# Altium PCB BGA Breakout.PcbDoc
Units mil, origin at the board's own origin, x right, y up, seen from the top; angles counter-clockwise.
Board outline 720.74 x 1220 mil, 2 copper layers (Top Layer, Bottom Layer); 3 components, 9 nets, 136 pads, 0 vias.
Unrouted connection lines stored in the file: 1.
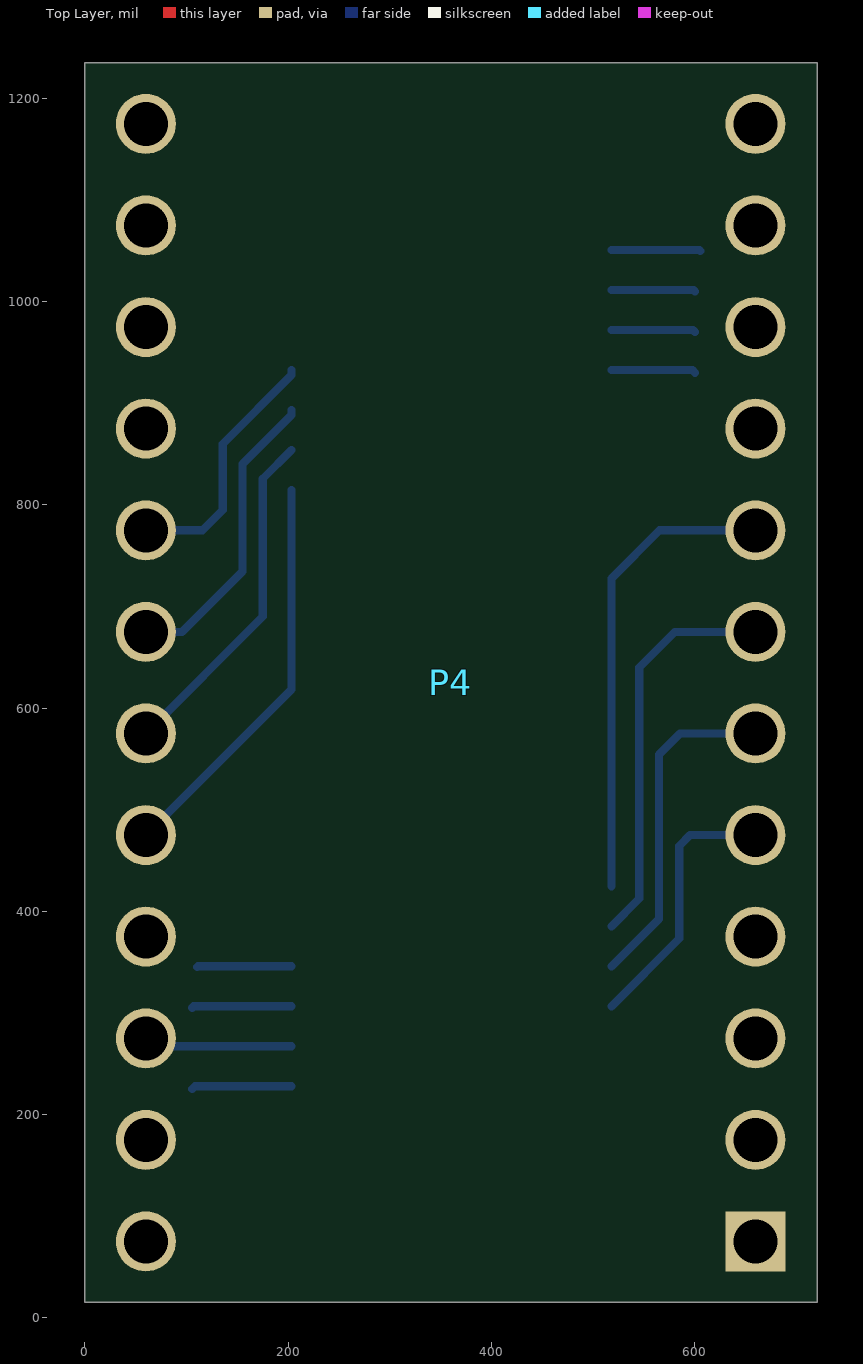
[diagram p0: Top Layer view]
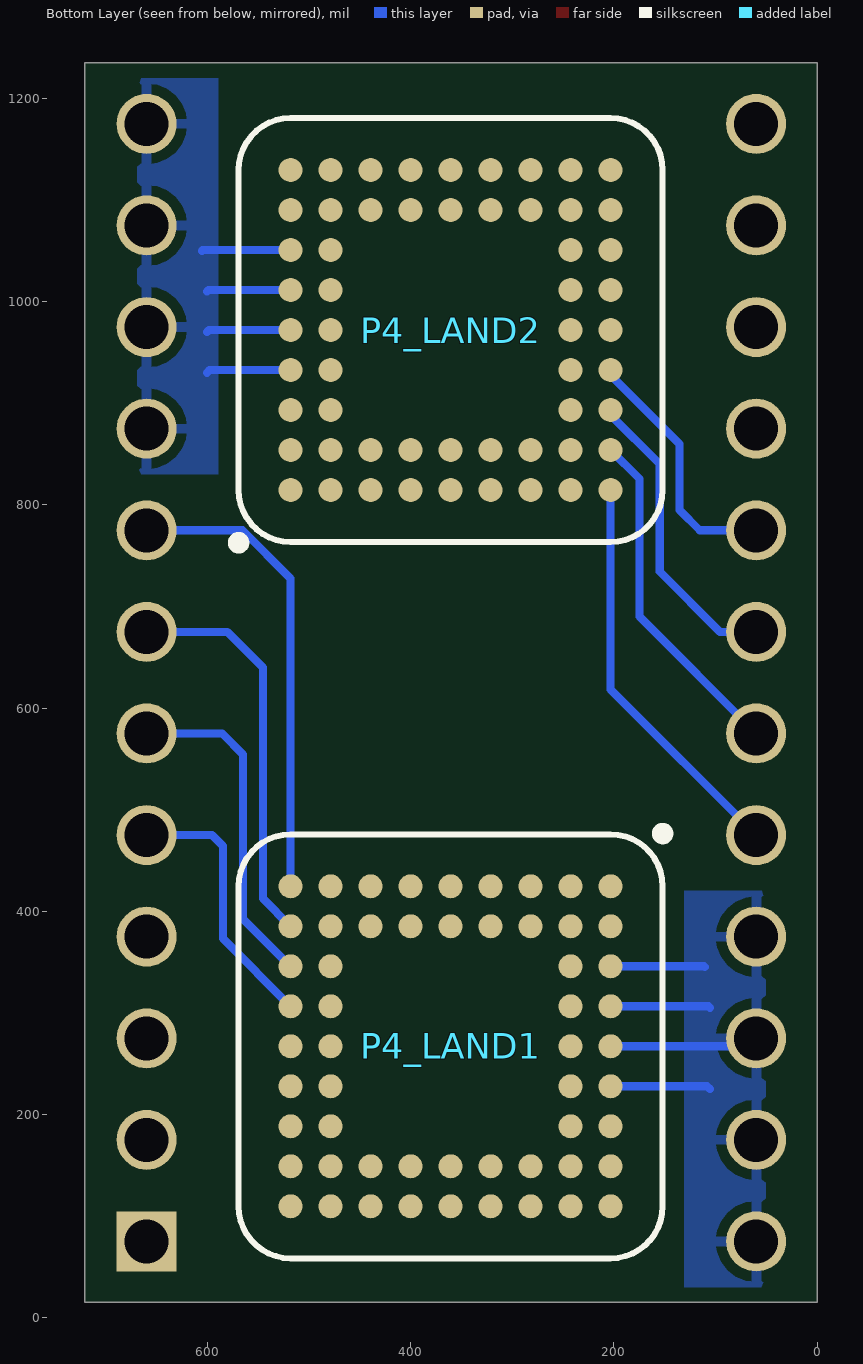
[diagram p1: Bottom Layer view, seen from below]

## Layer stack, top to bottom
Top Layer: signal copper 1.4
Dielectric: dielectric 12.6, FR-4, Dk 4.8
Bottom Layer: signal copper 1.4

## Board outline
0,15 0,1235 720.74,1235 720.74,15

## Design rules (kind name [scope] priority, off if disabled: settings)
Clearance [All] p1: gap=8
PolygonConnect [All] p1: connectstyle=Relief reliefconductorwidth=10 reliefentries=4 polygonreliefangle="90 Angle" airgapwidth=10
RoutingVias [All] p1: holewidth=28 width=50 viastyle="Through Hole" minholewidth=28 minwidth=50 maxholewidth=28 maxwidth=50
SolderMaskExpansion [All] p1: expansion=4
Width [All] p1: maxlimit=10 minlimit=8 preferedwidth=10
28 further rules are at their usual default settings.

## Components (designator, comment, footprint, x,y, rotation, side; value= is the part's Value field where it differs from the comment)
P4 "BBCMP-P24-M1200X700" BBCMP-P24-M1200X700 660,75 r90 top
P4_LAND1 "MODCMP-P056-M10X10_BGA" MB2100.01.A.2 360.79,267.09 r270 bottom
P4_LAND2 "MODCMP-P056-M10X10_BGA" MB2100.01.A.2 360.79,972.09 r90 bottom

## Footprints (in the part's own frame and the unit in brackets; to place one, negate y for a bottom-side part, rotate by r counter-clockwise, add the part's x,y. Pads: shape width x height; smd on the part's side, far side on the other; paste and mask are expansions set on the pad)
BBCMP-P24-M1200X700 [mm] "BB component,700mil width, 1200mil high"
  rect 1.5x1.5 hole 1.1: 1(0,0)
  round 1.5 hole 1.1: 2(2.54,0) 3(5.08,0) 4(7.62,0) 5(10.16,0) 6(12.7,0) 7(15.24,0) 8(17.78,0) 9(20.32,0) 10(22.86,0) 11(25.4,0) 12(27.94,0) 13(27.94,15.24) 14(25.4,15.24) 15(22.86,15.24) 16(20.32,15.24) 17(17.78,15.24) 18(15.24,15.24) 19(12.7,15.24) 20(10.16,15.24) 21(7.62,15.24) 22(5.08,15.24) 23(2.54,15.24) 24(0,15.24)
  body extent -1.27,-1.27 29.21,16.51, height 2.49
MB2100.01.A.2 [mm]
  round 0.6 smd mask+0.05: A1(-4,4) A2(-3,4) A3(-2,4) A4(-1,4) A5(0,4) A6(1,4) A7(2,4) A8(3,4) A9(4,4) B1(-4,3) B2(-3,3) B3(-2,3) B4(-1,3) B5(0,3) B6(1,3) B7(2,3) B8(3,3) B9(4,3) C1(-4,2) C2(-3,2) C8(3,2) C9(4,2) D1(-4,1) D2(-3,1) D8(3,1) D9(4,1) E1(-4,0) E2(-3,0) E8(3,0) E9(4,0) F1(-4,-1) F2(-3,-1) F8(3,-1) F9(4,-1) G1(-4,-2) G2(-3,-2) G8(3,-2) G9(4,-2) H1(-4,-3) H2(-3,-3) H3(-2,-3) H4(-1,-3) H5(0,-3) H6(1,-3) H7(2,-3) H8(3,-3) H9(4,-3) J1(-4,-4) J2(-3,-4) J3(-2,-4) J4(-1,-4) J5(0,-4) J6(1,-4) J7(2,-4) J8(3,-4) J9(4,-4)
  silkscreen extent -5.44,-5.3 5.3,5.42, body extent -5.01,-5.02 5.01,5, height 2.2

## Part data
P4_LAND1 P4_LAND2: "Module Component - 1mm Pitch, 56-Pin, 10mmX10mm"

## Nets (pads, with @x,y where several pads share a name; then routed paths per layer and width w, separated by ;. In a path a pad name is that pad's centre, name@x,y a point inside that pad or via, vN(x,y) a via of type N, cw(c..) or ccw(c..) an arc to the next point about the centre after c; other vN are vias at no path point)
GND: P4.9 P4.10 P4.11 P4.12 P4.21 P4.22 P4.23 P4.24 P4_LAND1.A3 P4_LAND1.A4 P4_LAND1.A5 P4_LAND1.A6 P4_LAND2.A4 P4_LAND2.A5 P4_LAND2.A6 P4_LAND2.A7 | length 774
  Bottom Layer w8: P4.22 67.91,267.09 P4_LAND1.A5 ; 105.63,225.04 108.31,227.72 P4_LAND1.A6 ; 105.63,305.04 107.05,306.46 P4_LAND1.A4 ; 110.63,345.04 111.42,345.83 P4_LAND1.A3 ; P4_LAND2.A4 597.95,932.72 600.63,930.04 ; P4_LAND2.A5 598.58,972.09 600.63,970.04 ; P4_LAND2.A6 599.21,1011.46 600.63,1010.04 ; P4_LAND2.A7 604.84,1050.83 605.63,1050.04
LEDA1: P4.8 P4_LAND1.J1 | length 464.4
  Bottom Layer w8: P4_LAND1.J1 518.27,727.68 565.59,775 P4.8
LEDA2: P4.7 P4_LAND1.J2 | length 395
  Bottom Layer w8: P4_LAND1.J2 545.63,412.56 545.63,640.04 580.59,675 P4.7
LEDA3: P4.6 P4_LAND1.J3 | length 331.5
  Bottom Layer w8: P4_LAND1.J3 565,392.56 565,554.41 585.59,575 P4.6
LEDA4: P4.5 P4_LAND1.J4 | length 265
  Bottom Layer w8: P4_LAND1.J4 585,373.19 585,464.41 595.59,475 P4.5
LEDB1: P4.20 P4_LAND2.J1 | length 399
  Bottom Layer w8: P4.20 203.31,618.31 P4_LAND2.J1
LEDB2: P4.19 P4_LAND2.J2 | length 338.3
  Bottom Layer w8: P4.19 175,690 175,825.67 P4_LAND2.J2
LEDB3: P4.18 P4_LAND2.J3 | length 298.6
  Bottom Layer w8: P4.18 95.59,675 155,734.41 155,840.05 203.31,888.36 P4_LAND2.J3
LEDB4: P4.17 P4_LAND2.J4 | length 249.6
  Bottom Layer w8: P4.17 115.59,775 135.63,795.04 135.63,860.05 203.31,927.73 P4_LAND2.J4
pads on no net: P4.1 P4.2 P4.3 P4.4 P4.13 P4.14 P4.15 P4.16 P4_LAND1.A1 P4_LAND1.A2 P4_LAND1.A7 P4_LAND1.A8 P4_LAND1.A9 P4_LAND1.B1 P4_LAND1.B2 P4_LAND1.B3 P4_LAND1.B4 P4_LAND1.B5 P4_LAND1.B6 P4_LAND1.B7 P4_LAND1.B8 P4_LAND1.B9 P4_LAND1.C1 P4_LAND1.C2 P4_LAND1.C8 P4_LAND1.C9 P4_LAND1.D1 P4_LAND1.D2 P4_LAND1.D8 P4_LAND1.D9 P4_LAND1.E1 P4_LAND1.E2 P4_LAND1.E8 P4_LAND1.E9 P4_LAND1.F1 P4_LAND1.F2 P4_LAND1.F8 P4_LAND1.F9 P4_LAND1.G1 P4_LAND1.G2 P4_LAND1.G8 P4_LAND1.G9 P4_LAND1.H1 P4_LAND1.H2 P4_LAND1.H3 P4_LAND1.H4 P4_LAND1.H5 P4_LAND1.H6 P4_LAND1.H7 P4_LAND1.H8 P4_LAND1.H9 P4_LAND1.J5 P4_LAND1.J6 P4_LAND1.J7 P4_LAND1.J8 P4_LAND1.J9 P4_LAND2.A1 P4_LAND2.A2 P4_LAND2.A3 P4_LAND2.A8 P4_LAND2.A9 P4_LAND2.B1 P4_LAND2.B2 P4_LAND2.B3 P4_LAND2.B4 P4_LAND2.B5 P4_LAND2.B6 P4_LAND2.B7 P4_LAND2.B8 P4_LAND2.B9 P4_LAND2.C1 P4_LAND2.C2 P4_LAND2.C8 P4_LAND2.C9 P4_LAND2.D1 P4_LAND2.D2 P4_LAND2.D8 P4_LAND2.D9 P4_LAND2.E1 P4_LAND2.E2 P4_LAND2.E8 P4_LAND2.E9 P4_LAND2.F1 P4_LAND2.F2 P4_LAND2.F8 P4_LAND2.F9 P4_LAND2.G1 P4_LAND2.G2 P4_LAND2.G8 P4_LAND2.G9 P4_LAND2.H1 P4_LAND2.H2 P4_LAND2.H3 P4_LAND2.H4 P4_LAND2.H5 P4_LAND2.H6 P4_LAND2.H7 P4_LAND2.H8 P4_LAND2.H9 P4_LAND2.J5 P4_LAND2.J6 P4_LAND2.J7 P4_LAND2.J8 P4_LAND2.J9

## Polygon pours and split planes (outlines as drawn)
GND on Bottom Layer "BTM-GND" (solid, pour order 9): 589.37,829.96 659.37,829.96 669.37,829.96 669.37,1219.96 589.37,1219.96
GND on Bottom Layer "BTM-GND" (solid, pour order 10): 130.63,420.04 60.63,420.04 50.63,420.04 50.63,30.04 130.63,30.04

## Silkscreen, mask and mechanical layers (free items; w line width, h text height)
Mechanical 1:
  the board outline again, w16
Mechanical 2:
  the board outline again, w16